# EAGLE board USBIRtoy.v3 (EAGLE 5.07)
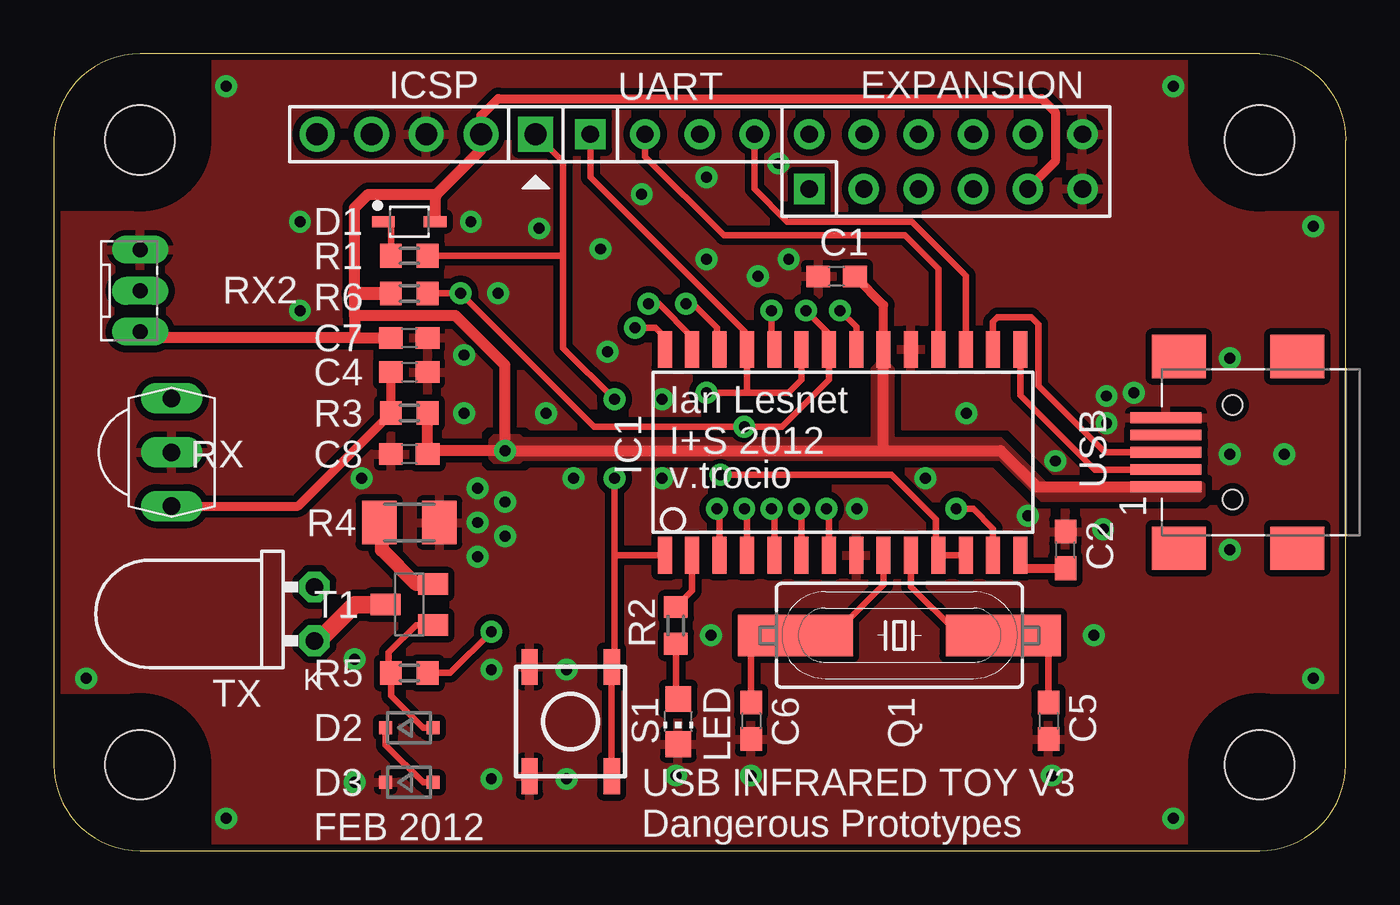
[diagram p0: board, top side]
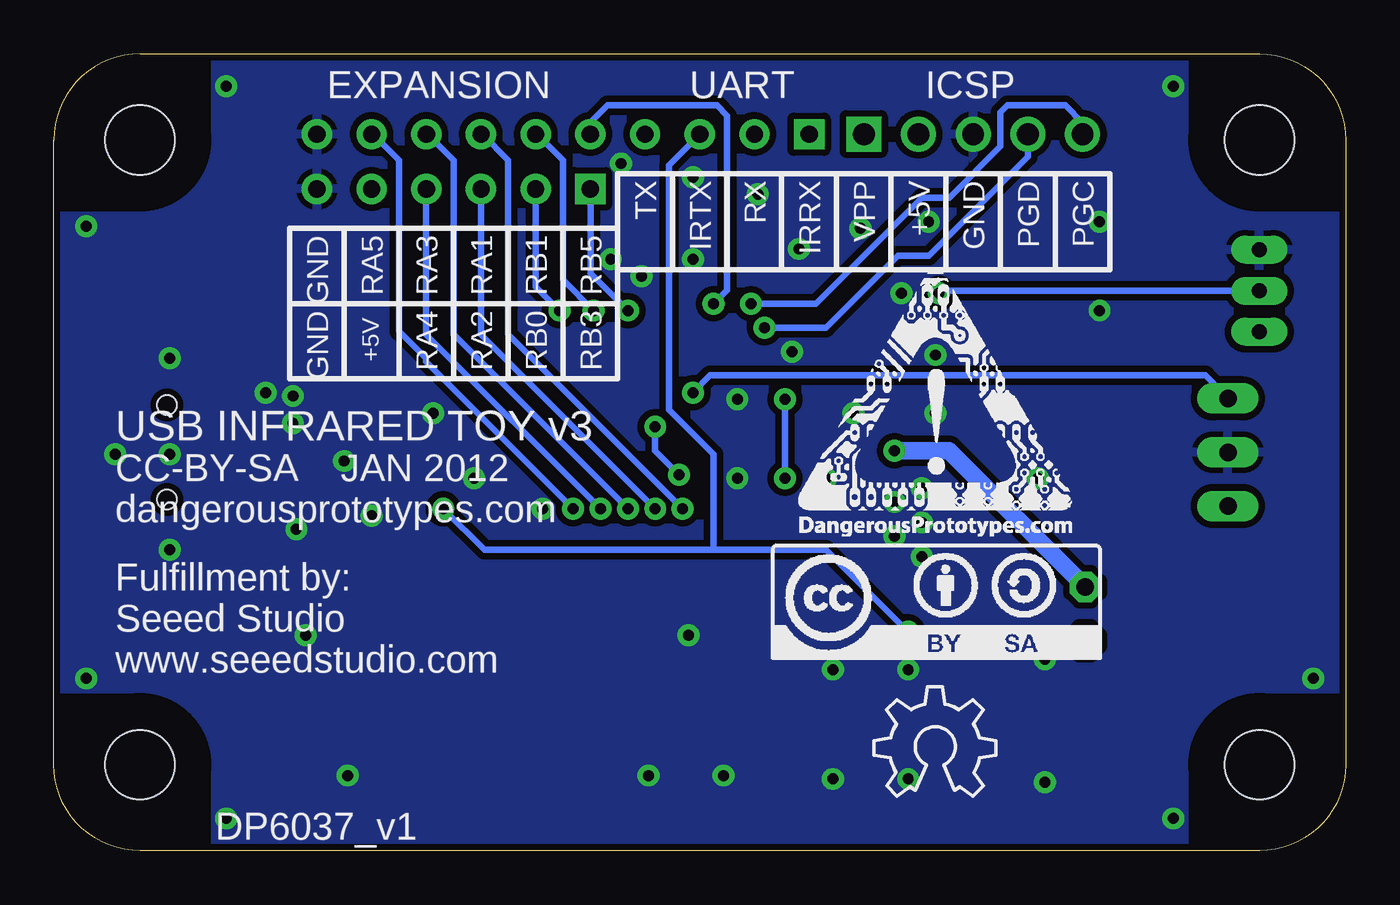
[diagram p1: board, bottom side, seen from below]

Size 60 x 37 mm. Coordinates in mm from the lower left corner, seen from the top.
Copper layers (1*16): Top 0.035mm / dielectric 1.5mm / Bottom 0.035mm
Design rules "SparkFun": minimum track width 8mil, minimum drill 20mil, track to track 8mil, track to pad 8mil, pad to pad 8mil, via to via 8mil, smd to smd 8mil, copper to edge 10mil, drill to drill 8mil, minimum pad ring 12mil, minimum via ring 10mil, stop-mask expansion 4mil, vias tented up to drill 25mil, thermal gap 10mil
tRestrict: area 1,1 to 7,7; area 1,30 to 7,36; area 53,30 to 59,36; area 53,1 to 59,7
bRestrict: area 1,30 to 7,36; area 1,1 to 7,7; area 53,1 to 59,7; area 53,30 to 59,36

## Footprints (pad centres in the part's own frame; a part is rotated, then mirrored left to right if it is on the bottom)
C603 = smd 1.1 x 1: 1 -0.85,0; 2 0.85,0
SOD2514X100N = smd 1.05 x 0.5: A 1.2,0; K -1.2,0
DO323 = smd 0.6 x 0.6: A 1.1,0; C -1.1,0
M2X6 = drill 0.8 square: 1 -6.35,-1.27 | drill 0.8 round: 2 -6.35,1.27; 3 -3.81,-1.27; 4 -3.81,1.27; 5 -1.27,-1.27; 6 -1.27,1.27; 7 1.27,-1.27; 8 1.27,1.27; 9 3.81,-1.27; 10 3.81,1.27; 11 6.35,-1.27; 12 6.35,1.27
SO28W = smd 0.65 x 1.7: 1 -7.62,-4.78; 2 -6.35,-4.78; 3 -5.08,-4.78; 4 -3.81,-4.78; 5 -2.54,-4.78; 6 -1.27,-4.78; 7 0,-4.78; 8 1.27,-4.78; 9 2.54,-4.78; 10 3.81,-4.78; 11 5.08,-4.78; 12 6.35,-4.78; 13 7.62,-4.78; 14 8.89,-4.78; 15 8.89,4.78; 16 7.62,4.78; 17 6.35,4.78; 18 5.08,4.78; 19 3.81,4.78; 20 2.54,4.78; 21 1.27,4.78; 22 0,4.78; 23 -1.27,4.78; 24 -2.54,4.78; 25 -3.81,4.78; 26 -5.08,4.78; 27 -6.35,4.78; 28 -7.62,4.78
HEADER_PRG_1X05_ICSP_B = drill 1.016 square: 1 -5.08,0 | drill 1.016 round: 2 -2.54,0; 3 0,0; 4 2.54,0; 5 5.08,0
CONN_USB_MINI-B = smd 2 x 2.5: BODY@1 -4.45,2.5; BODY@2 4.45,2.5; BODY@3 4.45,-3; BODY@4 -4.45,-3 | smd 0.5 x 3.3: D+ 0,3.1; D- -0.8,3.1; GND 1.6,3.1; ID 0.8,3.1; VUSB -1.6,3.1 | hole 0.9: -2.2,0; 2.2,0
CHIP-LED0805 = smd 1.2 x 1.2: A 0,-1.05; C 0,1.05
DP6037_V1 = hole 3.2: 4,4; 56,4; 56,33; 4,33
HC49UP = smd 5.334 x 1.93: 1 -4.826,0; 2 4.826,0
R603 = smd 1 x 1.1: 1 -0.85,0; 2 0.85,0
M1206 = smd 1.6 x 2: 1 -1.4,0; 2 1.4,0
TSOP18XX = drill 0.813 long: GND -0.001,-0.027; OUT -2.501,-0.027; VCC 2.499,-0.027
QSE15X = drill 0.7 long: 1 -1.9,-0.51; 2 0,-0.51; 3 1.91,-0.51
TACT_SWITCH_SMALL = smd 1.651 x 0.762: 1 -2.54,1.905; 2 2.54,1.905; 3 -2.54,-1.905; 4 2.54,-1.905
SOT23-BEC@1 = smd 1 x 1.4: B -0.95,-1.1; C 0,1.1; E 0.95,-1.1
LED-5MM-90DEG = drill 0.813 octagon: A 5.1,1.25; K 5.1,-1.25
M1X4 = drill 0.8 square: 1 0,0 | drill 0.8 round: 2 2.54,0; 3 5.08,0; 4 7.62,0

## Placement (x,y rotation side)
C1  0.1uf  [C603]  36.35,26.67 180 top
C2  0.22uf  [C603]  46.99,13.97 90 top
C4  0.22uF  [C603]  16.51,22.23 0 top
C5  27pf  [C603]  46.2,6.03 270 top
C6  27pf  [C603]  32.38,6.03 270 top
C7  0.22uF  [C603]  16.51,23.81 0 top
C8  1.0uF  [C603]  16.51,18.41 180 top
D1  BAS16J  [SOD2514X100N]  16.51,29.21 0 top
D2  BAS16J  [DO323]  16.51,5.71 0 top
D3  BAS16J  [DO323]  16.51,3.17 0 top
EXPANSION  CON_HEADER_2X06-PTH  [M2X6]  41.43,32 0 top
IC1  PIC18F2550_28W  [SO28W]  36,18.5 0 top
ICSP  CON_HEADER_PRG_PIC_ICSPB  [HEADER_PRG_1X05_ICSP_B]  17.3,33.27 180 top
J1  CON-USB-MINI-BUSB1  [CONN_USB_MINI-B]  54.75,18.5 90 top
LED  LED  [CHIP-LED0805]  29,6 180 top
PCB1  PCB_DP_RECTANGLE-37X60  [DP6037_V1]  0,0 0 top
Q1  20Mhz  [HC49UP]  39.27,10 180 top
R1  10K  [R603]  16.51,27.62 180 top
R2  2K7  [R603]  28.89,10.46 90 top
R3  390R  [R603]  16.51,20.32 0 top
R4  6R8  [M1206]  16.51,15.24 180 top
R5  3K6  [R603]  16.51,8.26 0 top
R6  390R  [R603]  16.51,25.88 180 top
RX  TSOP34838  [TSOP18XX]  5.5,18.5 270 top
RX2  QSE159  [QSE15X]  3.5,26 90 top
S1  SMD_TACT_SMALL  [TACT_SWITCH_SMALL]  24,6 270 top
T1  BC81840MTF  [SOT23-BEC@1]  16.51,11.43 90 top
TX  100mA IR LED  [LED-5MM-90DEG]  7,11 0 top
U$1  [OSHW_6X200_NOTEXT]  21.91,2.54 0 bottom
U$2  [CC-BY-SA]  26.67,8.89 0 bottom
U$4  [DP_LOGO_ART_0.5X0.5]  25.4,14.61 0 bottom
UART  CON_HEADER_1X04  [M1X4]  24.92,33.27 0 top

## Library data of the parts
C1 C2 C4-C8 D2 D3 EXPANSION ICSP J1 R1-R3 R5 R6 RX2 T1 TX U$2 UART = dp_devices
D1 = ipc-7351-diode
IC1 = microchip; MF: MICROCHIP; MPN: PIC18F2550-I/SO; OC_FARNELL: 9321268; OC_NEWARK: 73K1297
LED = led
PCB1 = PCBStandards
Q1 = crystal; OC_FARNELL: unknown; OC_NEWARK: unknown
R4 = rcl
RX = tsop
S1 = DP-logo
U$1 = ohw-logo
U$4 = DP2

## Nets
GND: C1.2 C2.2 C4.2 C5.2 C6.2 C7.2 C8.2 D3.C EXPANSION.11 EXPANSION.12 IC1.8 IC1.19 ICSP.3 J1.GND LED.C R4.1 RX2.3 RX.GND S1.3 S1.4
IRDETECT: EXPANSION.4 IC1.11 IC1.12 IC1.22 R6.1 RX2.2
IRRX: IC1.23 IC1.25 RX.OUT UART.1
IRTX: IC1.13 R5.2 UART.3
MCLR: IC1.1 ICSP.1 R1.1 S1.1 S1.2
N$1: C6.1 IC1.9 Q1.2
N$2: C5.1 IC1.10 Q1.1
N$3: C2.1 IC1.14
N$6: R4.2 T1.E
N$7: LED.A R2.1
N$8: C4.1 R3.1 RX.VCC
N$9: IC1.2 R2.2
N$12: D2.A R5.1 T1.B
N$13: T1.C TX.K
N$14: D2.C D3.A
N$17: D1.K R1.2
PGC: IC1.27 ICSP.5
PGD: IC1.28 ICSP.4
RA1: EXPANSION.6 IC1.3
RA2: EXPANSION.5 IC1.4
RA3: EXPANSION.8 IC1.5
RA4: EXPANSION.7 IC1.6
RA5: EXPANSION.10 IC1.7
RB0: EXPANSION.3 IC1.21
RB3: EXPANSION.1 IC1.24
RB5: EXPANSION.2 IC1.26
RC4: IC1.15 J1.D-
RC5: IC1.16 J1.D+
RX: IC1.18 UART.2
TX: IC1.17 UART.4
VCC: C1.1 C7.1 C8.1 D1.A EXPANSION.9 IC1.20 ICSP.2 J1.VUSB R3.2 R6.2 RX2.1 TX.A

## Tracks (layer width: path | path; a pad name or v marks a point on that pad's centre or on a via)
GND  (via drill 0.51)
  other vias: 25.72,23.18 34.13,27.46 11.43,25.08 11.43,29.21 28.26,17.3 24.13,17.3 46.51,18.1 48.74,14.92 57.15,18.41 32.38,3.49 46.35,3.49 13.97,8.89 54.61,13.97 45.24,15.56 42.39,20.32 48.9,19.84 14.29,17.3 19.68,15.24 20.32,8.41 23.81,8.41 30.53,10 28.89,3.49 50.16,21.27 13.97,3.18 25.4,27.94 30.32,27.46 22.54,28.89 20.64,25.88 54.61,22.86 28.26,20.95 19.05,20.32 40.48,17.3 37.31,15.88 19.05,23.02 22.86,20.32 20.32,3.33 23.81,3.33 1.5,8 8,35.5 52,35.5 58.5,29 58.5,8 52,1.5 8,1.5 30.32,31.27 33.66,31.91 19.37,29.21 19.68,16.83 19.68,13.65 20.95,16.19 20.95,14.61 32.7,26.67 27.31,30.48 54.61,18.41 48.89,21.11 48.31,10
  pour Top (isolate 0.305, rank 6): 0,-0.13 0,37 60,37 60,0
  pour Bottom (isolate 0.305): 0,-0.13 60,0 60,37 0,37
IRDETECT  (via drill 0.51)
  Top 0.305: IC1.12 IC1.11 40.96,13.84 40.96,15.4 38.89,17.46 v30.96,17.46 | R6.1 v18.89,25.88 25.08,19.68 v32.07,19.68 33.81,19.68 36,21.87 IC1.22 36,24.01 v34.92,25.08
  Bottom 0.305: RX2.2 18.7,26 v18.89,25.88 | v32.07,19.68 32.07,18.57 v30.96,17.46 | EXPANSION.4 37.56,33.27 36.51,32.23 | 36.51,32.23 | 36.51,32.23 36.35,32.07 36.35,26.51 v34.92,25.08
IRRX  (via drill 0.51)
  Top 0.305: IC1.23 34.73,21.87 34.13,21.27 v30.32,21.27 32.19,21.27 IC1.25 32.07,23.4 32.07,24.13 24.92,31.28 UART.1
  Bottom 0.305: v30.32,21.27 29.53,22.07 6.51,22.07 5.44,21 RX.OUT
IRTX  (via drill 0.51)
  Top 0.305: IC1.13 43.62,14.96 42.7,15.88 v41.91,15.88 | R5.2 18.41,8.26 v20.32,10.16
  Bottom 0.305: 29.37,13.97 40.01,13.97 v41.91,15.88 | 29.37,13.97 29.37,18.41 31.43,20.48 31.43,31.84 UART.3 | 29.37,13.97 24.13,13.97 v20.32,10.16
MCLR  (via drill 0.51)
  Top 0.305: S1.2 S1.1 26.04,8.67 26.04,13.72 | 26.04,13.72 IC1.1 | 26.04,13.72 v26.04,17.3 | 23.65,27.62 23.65,23.34 v26.04,20.95 | 23.65,27.62 R1.1 | 23.65,27.62 23.65,32 ICSP.1
  Bottom 0.305: v26.04,17.3 v26.04,20.95
N$1
  Top 0.305: IC1.9 38.54,12.35 36.2,10 Q1.2 | Q1.2 | C6.1 32.38,9.84 33.97,10 Q1.2
N$2
  Top 0.305: IC1.10 39.81,12.26 41.91,10.16 43.94,10.16 Q1.1 46.04,10 46.2,9.84 C5.1
N$3
  Top 0.406: C2.1 44.89,13.12 IC1.14
N$6
  Top 0.406: 15.24,15.11 R4.2
  Top 0.66: T1.E 16.83,12.38 15.24,13.97 15.24,15.11
N$7
  Top 0.305: R2.1 28.89,7.16 LED.A
N$8
  Top 0.406: C4.1 R3.1 11.34,16 RX.VCC
N$9
  Top 0.305: IC1.2 29.65,12.07 R2.2
N$12
  Top 0.305: T1.B 16.83,10.48 15.56,9.21 15.56,8.36 R5.1 15.66,7.2 17.14,5.71 D2.A
N$13
  Top 0.813: TX.K 12.29,9.75 13.97,11.43 T1.C
N$14
  Top 0.305: D2.C 15.41,4.91 17.14,3.17 D3.A
N$17
  Top 0.305: R1.2 15.66,29.21 D1.K
PGC  (via drill 0.51)
  Top 0.305: IC1.27 29.65,23.85 28.1,25.4 v27.62,25.4
  Bottom 0.305: ICSP.5 12.22,33.81 13.02,34.61 15.72,34.61 16.03,34.29 16.03,32.7 18.41,30.32 19.68,30.32 24.61,25.4 v27.62,25.4
PGD  (via drill 0.51)
  Top 0.305: IC1.28 28.38,23.85 27.94,24.29 v26.99,24.29
  Bottom 0.305: v26.99,24.29 24.13,24.29 20.8,27.62 19.37,27.62 14.76,32.23 ICSP.4
RA1  (via drill 0.51)
  Top 0.305: IC1.3 30.92,15.75 v30.8,15.88
  Bottom 0.305: EXPANSION.6 40.1,33.27 38.89,32.07 38.89,23.97 v30.8,15.88
RA2  (via drill 0.51)
  Top 0.305: IC1.4 32.19,15.75 v32.07,15.88
  Bottom 0.305: EXPANSION.5 40.16,23.97 v32.07,15.88
RA3  (via drill 0.51)
  Top 0.305: IC1.5 33.46,15.75 v33.34,15.88
  Bottom 0.305: EXPANSION.8 42.64,33.27 41.43,32.07 41.43,23.97 v33.34,15.88
RA4  (via drill 0.51)
  Top 0.305: IC1.6 34.73,15.75 v34.61,15.88
  Bottom 0.305: EXPANSION.7 42.7,23.97 v34.61,15.88
RA5  (via drill 0.51)
  Top 0.305: IC1.7 36,15.75 v35.88,15.88
  Bottom 0.305: v35.88,15.88 42.7,22.7 42.7,22.86 43.97,24.13 43.97,32.07 45.18,33.27 EXPANSION.10
RB0  (via drill 0.51)
  Top 0.305: IC1.21 37.27,24.32 v36.51,25.08
  Bottom 0.305: EXPANSION.3 37.62,26.19 v36.51,25.08
RB3  (via drill 0.51)
  Top 0.305: v33.34,25.08 33.34,23.4 IC1.24
  Bottom 0.305: EXPANSION.1 35.08,26.82 v33.34,25.08
RB5  (via drill 0.51)
  Top 0.305: v29.37,25.4 29.69,25.4 30.8,24.29 30.8,23.4 IC1.26
  Bottom 0.305: v29.37,25.4 28.73,26.04 28.73,34.13 29.21,34.61 34.29,34.61 35.08,33.82 EXPANSION.2
RC4
  Top 0.305: J1.D- 48.34,17.7 44.89,21.15 IC1.15
RC5
  Top 0.305: J1.D+ 48.81,18.5 45.72,21.59 45.72,24.45 45.4,24.77 43.81,24.77 43.62,24.57 IC1.16
RX
  Top 0.305: 41.12,23.32 IC1.18 41.08,27.02 39.53,28.57 31.11,28.57 27.46,32.23 UART.2
TX
  Top 0.305: IC1.17 42.35,26.71 39.85,29.21 34.06,29.21 32.54,30.73 UART.4
VCC  (via drill 0.51)
  Top 0.406: 17.78,30.48 17.71,30.41 | IC1.20 38.54,25.33 C1.1 | 17.52,18.57 C8.1 | ICSP.2 19.84,34.13 20.64,34.92 45.88,34.92 46.51,34.29 46.51,32 EXPANSION.9
  Top 0.457: 50.09,16.9 J1.VUSB
  Top 0.508: C8.1 R3.2 | 13.97,24.84 13.97,25.88 13.97,29.84 14.61,30.48 17.78,30.48 19.84,32.54 ICSP.2 | 13.97,24.84 18.65,24.84 20.95,22.54 v20.95,18.57 | v20.95,18.57 38.54,18.57 | 13.97,24.84 13.97,23.81 | 13.97,23.81 C7.1 | 17.71,30.41 D1.A | 13.97,23.81 4.23,23.81 RX2.1 | v20.95,18.57 17.52,18.57 | 38.54,18.57 IC1.20 | 38.54,18.57 43.97,18.57 45.65,16.9 50.09,16.9
  Top 0.61: 13.97,25.88 R6.2
  Bottom 0.813: v20.95,18.57 18.42,18.57 TX.A
  pour Top (no thermals): 46.04,16.99 53.34,16.99 53.34,16.51 53.18,16.35 45.88,16.35 43.97,18.26 21.75,18.26 21.59,18.1 20.48,18.1 20.32,18.26 20.32,19.05 20.48,19.21 21.59,19.21 21.75,19.05 37.94,19.05 38.1,19.21 38.1,22.38 38.26,22.54 38.74,22.54 38.89,22.38 38.89,19.21 39.05,19.05 43.97,19.05

## Text on the board
tPlace: Ian Lesnet | I+S 2012 | v.trocio | USB INFRARED TOY V3 | Dangerous Prototypes | FEB 2012
tNames: RX | USB
bNames: ICSP | UART | EXPANSION | PGC | PGD | GND | +5V | VPP | IRRX | RX | IRTX | TX | RB5 | RB1 | RA1 | RA3 | RA5 | GND | RB3 | RB0 | RA2 | RA4 | +5V | GND | USB INFRARED TOY v3 | JAN 2012 | CC-BY-SA | dangerousprototypes.com | Fulfillment by: | Seeed Studio | www.seeedstudio.com
Reference: Programming | Header | Serial Port | Expansion | RB5 | RB1 | RA1 | RA3 | RA5 | GND | CLOCK | DATA | GND | +5V | MCLR | IRRX | RX | IRTX | TX | RB3 | RB0 | RA2 | RA4 | +5V | GND | USB | USB INFRARED TOY v3 | CC-BY-SA | Ian Lesnet 2012 | http://dangerousprototypes.com